# EAGLE board SNARFBASE-v03i2-new232 (EAGLE 5.11)
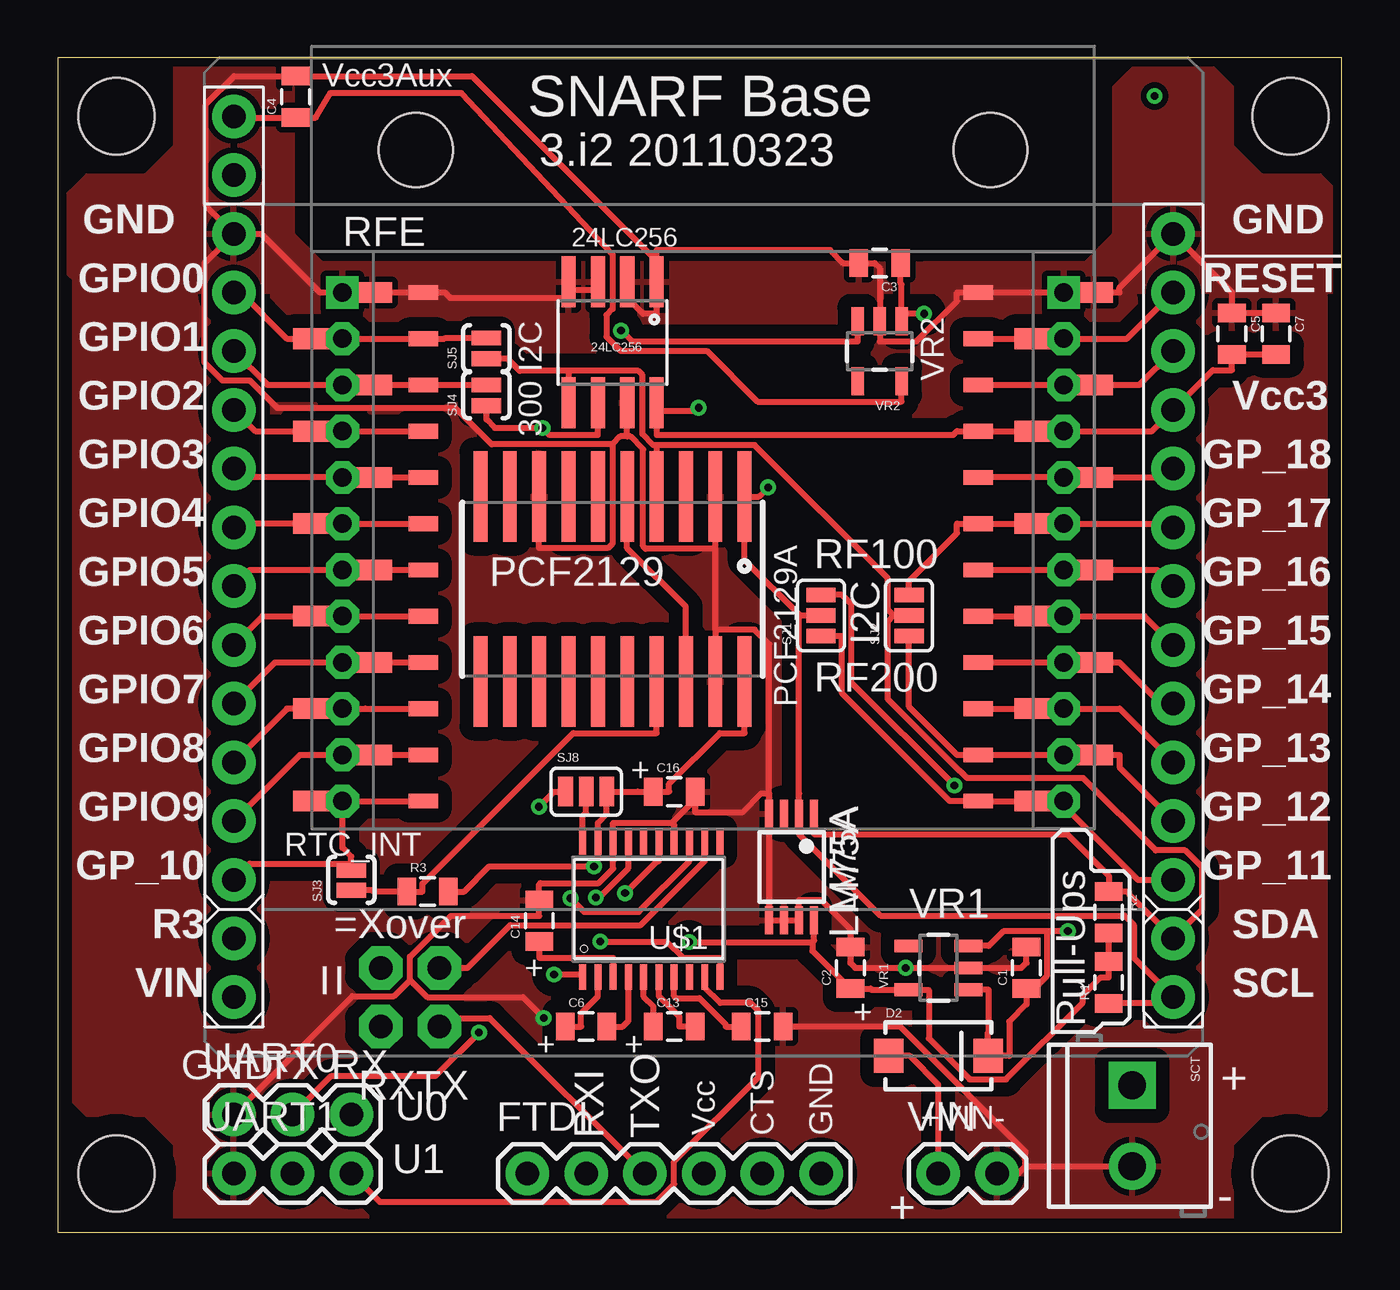
[diagram p0: board, top side]
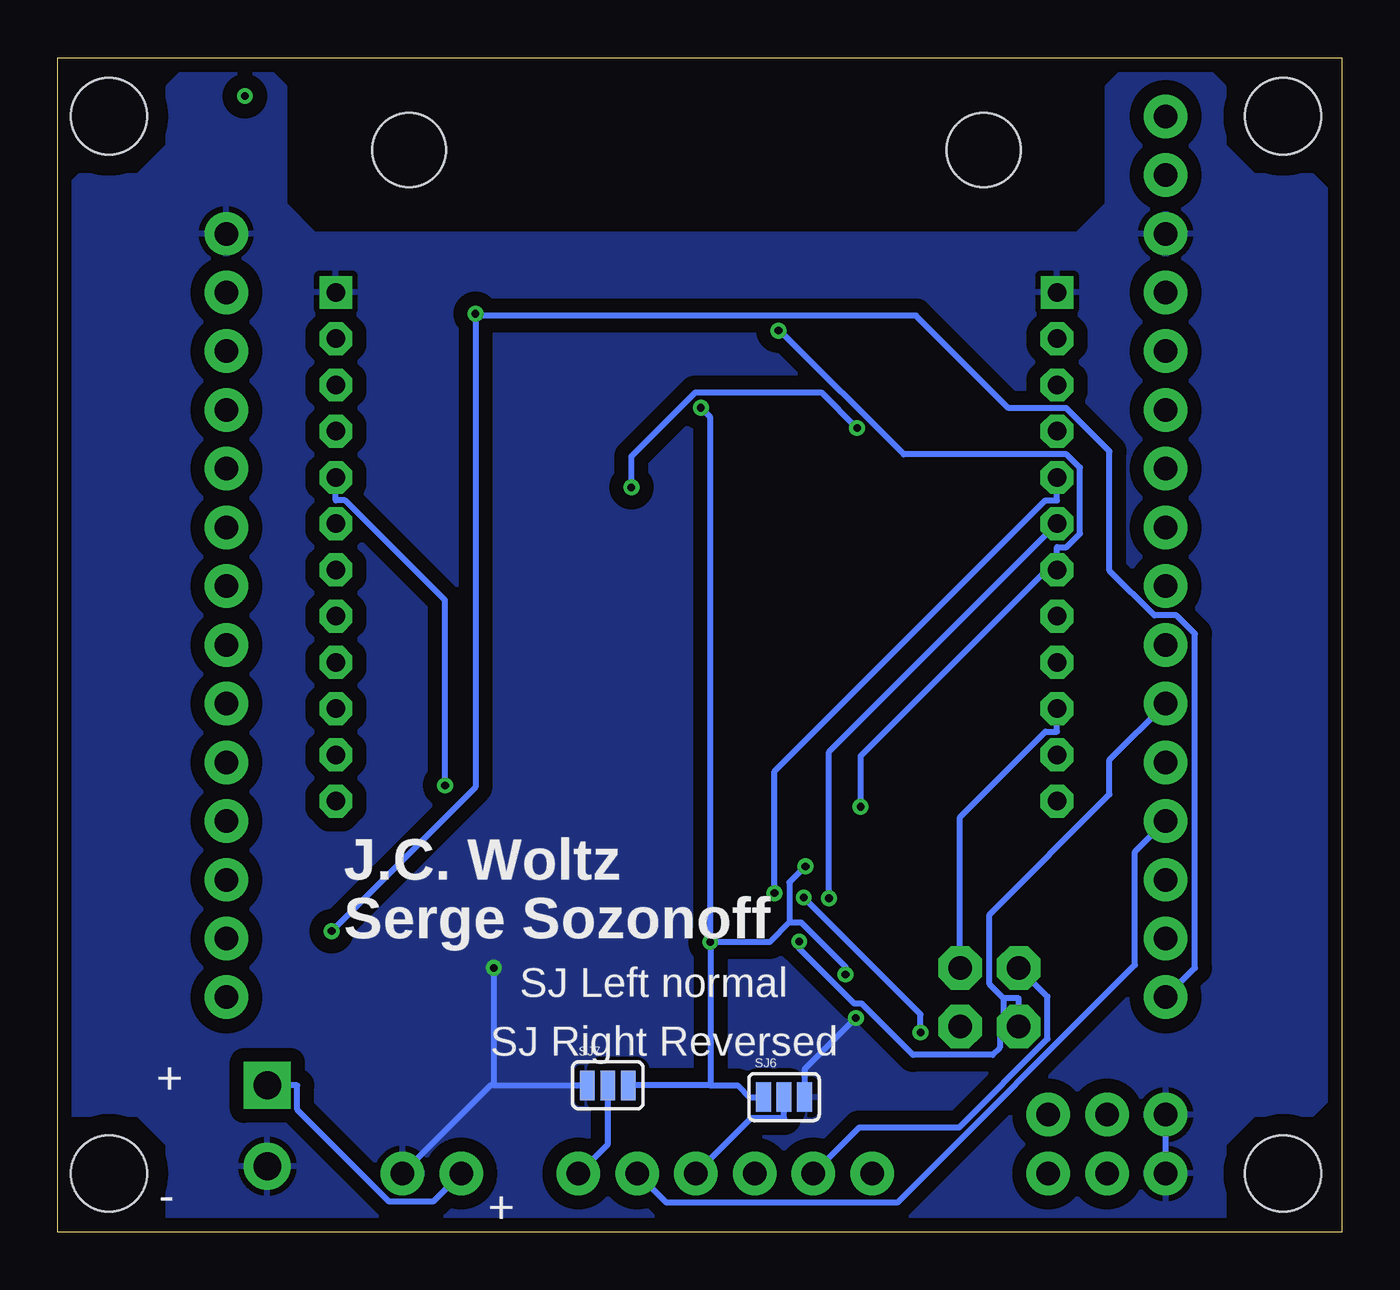
[diagram p1: board, bottom side, seen from below]

Size 55.55 x 50.79 mm. Coordinates in mm from the lower left corner, seen from the top.
Outline: 0,0 55.55,0 55.55,50.79 0,50.79 0,0
Copper layers (1*16): Top 0.0356mm / dielectric 1.5011mm / Bottom 0.0356mm
Design rules "LaenPCBOrder-JCModified": minimum track width 6mil, minimum drill 13mil, track to track 6mil, track to pad 6mil, pad to pad 6mil, via to via 6mil, smd to smd 6mil, copper to edge 15mil, drill to drill 6mil, minimum pad ring 12mil, minimum via ring 7mil, stop-mask expansion 4mil, vias tented up to drill 25mil, thermal gap 10mil
Net classes: 0 default: width 0.254 mm; 1 Power: width 0.508 mm; 2 smallsignal: width 0.152 mm; 3 stdsignal: width 0.254 mm

## Footprints (pad centres in the part's own frame; a part is rotated, then mirrored left to right if it is on the bottom)
SO08 = smd 0.61 x 2.21: 1 -1.905,-2.616; 2 -0.635,-2.616; 3 0.635,-2.616; 4 1.905,-2.616; 5 1.905,2.616; 6 0.635,2.616; 7 -0.635,2.616; 8 -1.905,2.616
SYNSJ-STACK = drill 1.016 pad 1.88 round: G0 0,-7.62; G1 0,-10.16; G2 0,-12.7; G3 0,-15.24; G4 0,-17.78; G5 0,-20.32; G6 0,-22.86; G7 0,-25.4; G8 0,-27.94; G9 0,-30.48; G10 0,-33.02; G11 40.64,-33.02; G12 40.64,-30.48; G13 40.64,-27.94; G14 40.64,-25.4; G15 40.64,-22.86; G16 40.64,-20.32; G17 40.64,-17.78; G18 40.64,-15.24; GND 0,-5.08; GND1 40.64,-5.08; R1 0,0; R2 0,-2.54; R3 0,-35.56; R4 0,-38.1; R5 40.64,-38.1; R6 40.64,-35.56; RESERVED 40.64,-10.16; RESET 40.64,-7.62; VCC 40.64,-12.7
0805 = smd 0.8 x 1.2: 1 -0.9,0; 2 0.9,0
SMA-DIODE = smd 1.27 x 1.47: A -2.15,0; C 2.15,0
1X06 = drill 1.016 pad 1.88 round: 1 0,0; 2 2.54,0; 3 5.08,0; 4 7.62,0; 5 10.16,0; 6 12.7,0
STAND-OFF = hole 3.302: 0,0
TSSOP8-3MM = smd 1.2 x 0.35: 1 -2.6,0.975; 2 -2.6,0.325; 3 -2.6,-0.325; 4 -2.6,-0.975; 5 2,-0.975; 6 2,-0.325; 7 2,0.325; 8 2,0.975
SO20W = smd 0.6 x 3.9: P$1 -5.715,-4; P$2 -4.445,-4; P$3 -3.175,-4; P$4 -1.905,-4; P$5 -0.635,-4; P$6 0.635,-4; P$7 1.905,-4; P$8 3.175,-4; P$9 4.445,-4; P$10 5.715,-4; P$11 5.715,4; P$12 4.445,4; P$13 3.175,4; P$14 1.905,4; P$15 0.635,4; P$16 -0.635,4; P$17 -1.905,4; P$18 -3.175,4; P$19 -4.445,4; P$20 -5.715,4
SYNAPSERFENGINE-THM-SMT-JACK2 = drill 0.8 square: 1 0,0; 24 31.2,0 | drill 0.8 pad 1.422 octagon: 2 0,-2; 3 0,-4; 4 0,-6; 5 0,-8; 6 0,-10; 7 0,-12; 8 0,-14; 9 0,-16; 10 0,-18; 11 0,-20; 12 0,-22; 13 31.2,-22; 14 31.2,-20; 15 31.2,-18; 16 31.2,-16; 17 31.2,-14; 18 31.2,-12; 19 31.2,-10; 20 31.2,-8; 21 31.2,-6; 22 31.2,-4; 23 31.2,-2 | smd 1.67 x 0.89: P1 1.3,0; P2 -1.3,-2; P3 1.3,-4; P4 -1.3,-6; P5 1.3,-8; P6 -1.3,-10; P7 1.3,-12; P8 -1.3,-14; P9 1.3,-16; P10 -1.3,-18; P11 1.3,-20; P12 -1.3,-22; P13 29.9,-22; P14 32.5,-20; P15 29.9,-18; P16 32.5,-16; P17 29.9,-14; P18 32.5,-12; P19 29.9,-10; P20 32.5,-8; P21 29.9,-6; P22 32.5,-4; P23 29.9,-2; P24 32.5,0 | smd 1.27 x 0.635: P201 3.5,0; P202 3.5,-2; P203 3.5,-4; P204 3.5,-6; P205 3.5,-8; P206 3.5,-10; P207 3.5,-12; P208 3.5,-14; P209 3.5,-16; P210 3.5,-18; P211 3.5,-20; P212 3.5,-22; P213 27.5,-22; P214 27.5,-20; P215 27.5,-18; P216 27.5,-16; P217 27.5,-14; P218 27.5,-12; P219 27.5,-10; P220 27.5,-8; P221 27.5,-6; P222 27.5,-4; P223 27.5,-2; P224 27.5,0 | hole 3.2: 3.17,6.16; 28.03,6.16
2X02_PTH = drill 1.016 pad 1.88 octagon: 1 -1.27,-1.27; 2 -1.27,1.27; 3 1.27,-1.27; 4 1.27,1.27
SCREWTERMINAL-3.5MM-2 = drill 1.2 pad 2.032 square: 1 0,0 | drill 1.2 pad 2.032 round: 2 3.5,0
SJ_3 = smd 0.635 x 1.27: 1 -0.889,0; 2 0,0; 3 0.889,0
SJ_2S-NOTRACE = smd 0.635 x 1.27: 1 -0.45,0; 2 0.4,0
SJ_2S-NO = smd 0.635 x 1.27: 1 -0.45,0; 2 0.45,0
SJ_3_PASTE1&2 = smd 0.635 x 1.27: 1 -0.889,0; 2 0,0; 3 0.889,0
TSSOP20-JC = smd 1.1 x 0.3: 1 -2.937,2.693; 2 -2.937,2.032; 3 -2.937,1.372; 4 -2.937,0.712; 5 -2.937,0.051; 6 -2.937,-0.609; 7 -2.937,-1.27; 8 -2.943,-1.93; 9 -2.937,-2.59; 10 -2.937,-3.251; 11 2.905,-3.251; 12 2.905,-2.59; 13 2.911,-1.93; 14 2.905,-1.27; 15 2.905,-0.609; 16 2.905,0.051; 17 2.905,0.712; 18 2.905,1.372; 19 2.905,2.032; 20 2.905,2.693
1X03 = drill 1.016 pad 1.88 round: 1 0,0; 2 2.54,0; 3 5.08,0
1X02 = drill 1.016 pad 1.88 round: 1 0,0; 2 2.54,0
SOT23-5 = smd 0.55 x 1.2: 1 -0.95,-1.3; 2 0,-1.3; 3 0.95,-1.3; 4 0.95,1.3; 5 -0.95,1.3

## Placement (x,y rotation side)
24LC256  24LC256T-I/SN  [SO08]  24,38.48 180 top
ADDON  SYNAPSE-SJ-STCKINGD30-1600  [SYNSJ-STACK]  7.62,48.26 0 top
C1  1uF  [0805]  41.91,11.43 90 top
C2  1uF  [0805]  34.29,11.43 90 top
C3  1uF  [0805]  35.56,41.91 180 top
C4  1uF  [0805]  10.29,49.1 90 top
C5  1uF  [0805]  50.8,38.86 270 top
C6  0.1uF  [0805]  22.86,8.89 0 top
C7  10uF  [0805]  52.7,38.86 270 top
C13  0.1uF  [0805]  26.67,8.89 0 top
C14  0.1uF  [0805]  20.83,13.46 90 top
C15  0.1uF  [0805]  30.48,8.89 0 top
C16  0.1uF  [0805]  26.67,19.05 0 top
D2  [SMA-DIODE]  38.1,7.62 0 top
FTDI  [1X06]  20.32,2.54 0 top
JP6  STAND-OFF  [STAND-OFF]  53.34,2.54 0 top
JP9  STAND-OFF  [STAND-OFF]  2.54,2.54 0 top
JP10  STAND-OFF  [STAND-OFF]  53.34,48.26 0 top
JP11  STAND-OFF  [STAND-OFF]  2.54,48.26 0 top
LM75A  LM75AJC-TEST  [TSSOP8-3MM]  31.75,15.49 270 top
PCF2129A  PCF2129ASO20  [SO20W]  24,27.81 180 top
R1  [0805]  45.47,10.79 90 top
R2  [0805]  45.47,13.84 270 top
R3  [0805]  16,14.73 0 top
RFE  RFE  [SYNAPSERFENGINE-THM-SMT-JACK2]  12.32,40.64 0 top
RXTX  SERIAL_CROSSOVER  [2X02_PTH]  15.24,10.16 180 top
SCT  [SCREWTERMINAL-3.5MM-2]  46.48,6.35 270 top
SJ1  [SJ_3]  33.02,26.67 90 top
SJ2  [SJ_3]  36.83,26.67 90 top
SJ3  SOLDERJUMPERNC2  [SJ_2S-NOTRACE]  12.7,15.24 90 top
SJ4  SOLDERJUMPERNO  [SJ_2S-NO]  18.54,36.2 90 top
SJ5  SOLDERJUMPERNO  [SJ_2S-NO]  18.54,38.23 90 top
SJ6  [SJ_3_PASTE1&2]  24.13,5.84 0 bottom
SJ7  [SJ_3_PASTE1&2]  31.75,6.35 0 bottom
SJ8  [SJ_3_PASTE1&2]  22.86,19.05 0 top
U$1  ICL3223JC  [TSSOP20-JC]  25.4,13.97 90 top
UART0  [1X03]  7.62,5.08 0 top
UART1  [1X03]  7.62,2.54 0 top
VIN  [1X02]  38.1,2.54 0 top
VR1  MCP1802  [SOT23-5]  38.1,11.43 90 top
VR2  MCP1802  [SOT23-5]  35.56,38.1 180 top

## Library data of the parts
24LC256 D2 FTDI JP6 JP9-JP11 R1-R3 SCT SJ1-SJ8 UART0 UART1 VIN = SparkFun
ADDON C1-C7 C13-C16 LM75A PCF2129A RFE RXTX U$1 VR1 VR2 = 0_jc-custom

## Nets
!FORCEOFF: SJ8.2 U$1.20
FTDI_GND: FTDI.6 SJ7.2
FTDI_VCC: FTDI.4 SJ6.2
GND: 24LC256.1 24LC256.2 24LC256.3 24LC256.4 24LC256.7 ADDON.GND ADDON.GND1 C1.2 C2.2 C3.2 C4.2 C5.1 C7.1 C14.2 C15.2 C16.2 LM75A.4 LM75A.5 LM75A.6 LM75A.7 PCF2129A.P$2 PCF2129A.P$8 PCF2129A.P$19 RFE.1 RFE.24 RFE.P1 RFE.P24 RFE.P201 RFE.P224 SCT.2 SJ6.3 SJ7.1 U$1.14 U$1.18 UART0.1 UART1.1 VIN.2 VR1.2 VR2.2
GPIO0: ADDON.G0 RFE.2 RFE.P2 RFE.P202 SJ5.2
GPIO1: ADDON.G1 RFE.3 RFE.P3 RFE.P203 SJ4.2
GPIO2: ADDON.G2 RFE.4 RFE.P4 RFE.P204
GPIO3: ADDON.G3 RFE.5 RFE.P5 RFE.P205 U$1.15
GPIO4: ADDON.G4 RFE.6 RFE.P6 RFE.P206 U$1.13
GPIO5: ADDON.G5 RFE.7 RFE.P7 RFE.P207 SJ8.1 VR2.3
GPIO6: ADDON.G6 RFE.8 RFE.P8 RFE.P208
GPIO7: ADDON.G7 RFE.9 RFE.P9 RFE.P209 RXTX.4 U$1.10
GPIO8: ADDON.G8 RFE.10 RFE.P10 RFE.P210 RXTX.1 U$1.12
GPIO9: ADDON.G9 FTDI.5 RFE.11 RFE.P11 RFE.P211
GPIO10: ADDON.G10 RFE.12 RFE.P12 RFE.P212 SJ3.2
GPIO11: ADDON.G11 RFE.13 RFE.P13 RFE.P213 SJ1.1
GPIO12: ADDON.G12 RFE.14 RFE.P14 RFE.P214 SJ2.1
GPIO13: ADDON.G13 RFE.15 RFE.P15 RFE.P215
GPIO14: ADDON.G14 RFE.16 RFE.P16 RFE.P216
GPIO15: ADDON.G15 RFE.17 RFE.P17 RFE.P217
GPIO16: ADDON.G16 RFE.18 RFE.P18 RFE.P218
GPIO17: ADDON.G17 RFE.19 RFE.P19 RFE.P219 SJ2.3
GPIO18: ADDON.G18 RFE.20 RFE.P20 RFE.P220 SJ1.3
GPIO19: ADDON.RESERVED RFE.22 RFE.P22 RFE.P222
IFS: PCF2129A.P$5 PCF2129A.P$18
N$1: C13.1 U$1.5
N$2: C13.2 U$1.6
N$3: C6.1 U$1.2
N$5: C6.2 U$1.4
N$7: FTDI.1
N$9: C14.1 U$1.3
N$10: C15.1 U$1.7
N$11: LM75A.3
N$12: ADDON.R2
N$16: ADDON.R3
N$20: U$1.11
R6: PCF2129A.P$17 R3.1 SJ3.1
RESET_L: ADDON.RESET RFE.23 RFE.P23 RFE.P223
RX0: UART0.3
RX1: U$1.9 UART1.3
RXI: FTDI.2 RXTX.3
SCL: 24LC256.6 ADDON.R5 LM75A.2 PCF2129A.P$1 R1.1 SJ1.2 SJ4.1
SDA: 24LC256.5 ADDON.R6 LM75A.1 PCF2129A.P$4 R2.1 SJ2.2 SJ5.1
TX0: U$1.17 UART0.2
TX1: UART1.2
TXO: FTDI.3 RXTX.2
VCC3: 24LC256.8 ADDON.VCC C2.1 C5.2 C7.2 C16.1 LM75A.8 PCF2129A.P$20 R1.2 R2.2 R3.2 RFE.21 RFE.P21 RFE.P221 SJ6.1 SJ7.3 SJ8.3 U$1.1 U$1.19 VR1.5
VCC3A: ADDON.R1 C4.1 VR2.5
VIN: ADDON.R4 C1.1 C3.1 D2.C VR1.1 VR1.3 VR2.1
VIN_PREDIODE: D2.A SCT.1 VIN.1

## Tracks (layer width: path | path; a pad name or v marks a point on that pad's centre or on a via)
!FORCEOFF
  Top 0.254: SJ8.2 22.86,18.14 22.71,17.98 U$1.20
BOB  (via drill 0.33 pad 0.69)
  other vias: 47.45,49.14
FTDI_GND
  Bottom 0.254: SJ7.2 31.75,3.81 FTDI.6
FTDI_VCC
  Bottom 0.254: SJ6.2 24.13,4.93 25.55,4.93 FTDI.4
GND  (via drill 0.33 pad 0.69)
  Top 0.254: 23.99,34.07 18.78,34.07 17.21,35.64 9.51,35.64 8.31,36.83 7.12,36.83 6.35,37.6 6.35,41.91 ADDON.GND | 24.64,34.41 24.33,34.41 23.99,34.07 | 23.99,34.07 23.99,29.77 23.8,29.58 20.83,29.58 PCF2129A.P$8 | 15.24,10.9 15.24,11.91 17.01,13.68 20.83,13.68 C14.2 20.83,15.04 20.88,15.1 23.4,15.1 24.03,15.72 24.03,16.05 U$1.18 24.03,17.29 24.03,17.7 26.57,17.7 | UART0.1 12.75,10.21 14.55,10.21 15.24,10.9 | 15.24,10.9 15.98,10.16 20.12,10.16 v21.02,9.26 | 25.91,42.01 17.92,50 C4.2 7.63,50 6.4,48.77 6.4,44.4 ADDON.GND | 25.91,42.01 25.91,42.48 33.41,42.48 33.98,41.91 C3.2 34.98,41.91 35.34,41.91 35.56,41.69 VR2.2 35.56,38.52 37.16,38.52 38.9,40.27 38.9,40.64 RFE.P224 RFE.24 RFE.P24 45.93,40.64 45.93,40.85 ADDON.GND1 50.8,40.64 C5.1 C7.1 | 25.91,42.01 24LC256.1 25.91,39.71 25.33,39.71 24.64,40.41 24LC256.2 | 28.45,26.06 PCF2129A.P$19 | 28.45,26.06 28.45,29.56 | 28.45,26.06 30.15,26.06 30.77,25.44 30.77,18.97 | 27.57,18.89 27.57,18.17 29.63,18.17 30.43,18.97 30.77,18.97 | 27.57,18.89 27.57,18.91 27.57,18.97 C16.2 | 26.57,17.7 27.57,18.7 27.57,18.89 | 26.57,17.7 26.67,17.61 U$1.14 | 28.45,29.56 PCF2129A.P$2 | 28.45,29.56 25.44,29.56 25.33,29.66 25.33,33.86 24.77,34.41 24.64,34.41 | 24.64,34.41 24.64,34.48 24LC256.7 | 22.1,40.75 22.1,40.41 16.97,40.41 16.73,40.64 RFE.P201 RFE.P1 RFE.1 11.34,40.64 8.79,43.18 ADDON.GND | 22.1,40.75 24LC256.4 | 22.1,40.75 23.37,40.75 24LC256.3 | C1.2 41.91,11.65 41.69,11.43 VR1.2 38.96,11.43 38.52,11.43 v36.69,11.43 34.51,11.43 34.29,11.65 34.29,11.99 C2.2 34.29,13.1 33.02,14.37 32.08,14.37 LM75A.7 LM75A.6 LM75A.5 LM75A.4 30.77,18.97
  Top 0.254: 41.87,2.85 41.87,3.47 36.46,8.89 32.06,8.89 C15.2 | VIN.2 41.56,2.54 41.87,2.85 | 41.87,2.85 SCT.2
  Bottom 0.254: v21.02,9.26 23.24,7.04 SJ6.3 | 36.69,6.35 36.83,6.35 VIN.2 | 36.69,6.35 SJ7.1 | v36.69,11.43 36.69,6.35 | UART1.1 UART0.1
  pour Top (isolate 0.61): 0,41.91 0,6.35 1.27,5.08 3.81,5.08 5.08,3.81 5.08,0 50.8,0 50.8,3.81 52.07,5.08 54.61,5.08 55.88,6.35 55.88,41.91
  pour Bottom (isolate 0.61): 0,44.45 0,6.35 1.27,5.08 3.81,5.08 5.08,3.81 5.08,0 50.8,0 50.8,3.81 52.07,5.08 55.88,5.08 55.88,44.45 54.61,45.72 52.07,45.72 50.8,46.99 50.8,49.53 49.53,50.8 46.99,50.8 45.72,49.53 45.72,44.45 44.45,43.18 11.43,43.18 10.16,44.45 10.16,49.53 8.89,50.8 6.35,50.8 5.08,49.53 5.08,46.99 3.81,45.72 1.27,45.72
  pour Top (isolate 0.254): 0,41.91 0,44.45 1.27,45.72 3.81,45.72 5.08,46.99 5.08,50.8 8.89,50.8 10.16,49.53 10.16,43.18 11.43,41.91 44.45,41.91 45.72,43.18 45.72,49.53 46.99,50.8 49.53,50.8 50.8,49.53 50.8,46.99 52.07,45.72 54.61,45.72 55.88,44.45 55.88,40.64 1.27,40.64
GPIO0
  Top 0.254: ADDON.G0 7.9,40.64 9.9,38.64 RFE.P2 RFE.2 RFE.P202 16.28,38.64 16.73,38.64 16.77,38.68 SJ5.2
GPIO1
  Top 0.254: ADDON.G1 9.08,36.64 RFE.3 RFE.P3 RFE.P203 16.28,36.64 16.73,36.64 16.74,36.65 SJ4.2
GPIO2
  Top 0.254: ADDON.G2 8.54,34.64 RFE.P4 RFE.4 RFE.P204
GPIO3  (via drill 0.33 pad 0.69)
  Top 0.254: U$1.15 26.01,16.05 25.92,16.05 v24.54,14.66 | ADDON.G3 8,32.64 RFE.5 RFE.P5 RFE.P205
  Bottom 0.254: RFE.5 12.32,31.65 12.81,31.65 24.54,19.92 v24.54,14.66
GPIO4  (via drill 0.33 pad 0.69)
  Top 0.254: U$1.13 27.33,16.05 25.13,13.85 22.78,13.85 v22.18,14.44 | RFE.P206 RFE.6 RFE.P6 7.78,30.64 ADDON.G4
  Bottom 0.254: v22.18,14.44 22.18,20.78 RFE.6
GPIO5  (via drill 0.33 pad 0.69)
  Top 0.254: SJ8.1 21.37,19.05 21.37,18.95 v20.82,18.4 | VR2.3 34.61,38.52 24.84,38.52 v24.37,38.99 | RFE.P207 14.73,28.64 14.18,28.64 RFE.P7 RFE.7 8.32,28.64 ADDON.G5
  Bottom 0.254: v24.37,38.99 24.3,38.99 18.95,33.64 11.9,33.64 11.33,33.06 11.33,30.21 11.91,29.63 12.32,29.63 12.32,29.08 | 12.32,29.08 20.82,20.59 v20.82,18.4 | RFE.7 12.32,29.08
GPIO6
  Top 0.254: ADDON.G6 8.86,26.64 RFE.P8 RFE.8 RFE.P208
GPIO7  (via drill 0.33 pad 0.69)
  Top 0.254: U$1.10 28.65,11.86 27.05,11.86 26.34,12.57 v23.47,12.57 | ADDON.G7 9.4,24.64 RFE.9 RFE.P9 RFE.P209
  Bottom 0.254: v23.47,12.57 23.47,12.26 21.09,9.89 20.76,9.89 18.54,7.66 15.11,7.66 14.79,7.98 14.79,8.88 14.63,9.05 14.63,10.11 | ADDON.G7 10.04,20.44 10.04,18.93 15.24,13.74 15.24,10.72 14.63,10.11 | 14.63,10.11 13.97,10.11 RXTX.4
GPIO8
  Top 0.254: ADDON.G8 9.9,22.61 9.9,22.64 RFE.P10 RFE.10 13.31,22.64 RFE.P210 | RXTX.1 17.73,11.43 19.57,13.28 25.22,13.28 27.99,16.05 U$1.12
  Bottom 0.254: RFE.10 12.32,21.65 12.81,21.65 16.51,17.95 RXTX.1
GPIO9
  Top 0.254: ADDON.G9 10.48,20.64 RFE.11 RFE.P11 RFE.P211
  Bottom 0.254: FTDI.5 29.22,1.28 19.23,1.28 8.94,11.56 8.94,16.46 ADDON.G9
GPIO10
  Top 0.254: 12.7,15.94 8.32,15.94 ADDON.G10 | 12.7,15.94 12.7,16.24 12.32,16.62 RFE.12 | 12.7,15.94 SJ3.2 | RFE.12 RFE.P12 | RFE.12 RFE.P212
GPIO11
  Top 0.254: SJ1.1 33.93,25.78 33.93,23.3 38.59,18.64 38.9,18.64 RFE.P213 RFE.P13 43.33,18.64 | 43.33,18.64 RFE.13 | 43.33,18.64 46.73,15.24 ADDON.G11
GPIO12
  Top 0.254: ADDON.G12 45.93,20.11 45.93,20.64 RFE.P14 RFE.14 RFE.P214 39.36,20.64 38.9,20.64 36.83,22.71 SJ2.1
GPIO13
  Top 0.254: ADDON.G13 45.94,22.64 RFE.15 RFE.P15 RFE.P215
GPIO14
  Top 0.254: ADDON.G14 47.71,22.86 45.93,24.64 RFE.P16 RFE.16 RFE.P216
GPIO15
  Top 0.254: ADDON.G15 47.02,26.64 RFE.17 RFE.P17 RFE.P217
GPIO16
  Top 0.254: ADDON.G16 47.56,28.64 RFE.P18 RFE.18 RFE.P218
GPIO17
  Top 0.254: ADDON.G17 48.1,30.64 RFE.19 RFE.P19 RFE.P219 39.36,30.64 38.9,30.64 38.9,30.23 36.83,28.16 SJ2.3
GPIO18  (via drill 0.33 pad 0.69)
  Top 0.254: SJ1.3 33.93,27.56 34.34,27.15 34.34,23.77 v38.79,19.32 | ADDON.G18 47.88,32.64 RFE.P20 RFE.20 RFE.P220
  Bottom 0.254: RFE.20 43.52,31.65 43.11,31.65 38.79,27.33 v38.79,19.32
GPIO19
  Top 0.254: ADDON.RESERVED 46.8,36.64 RFE.P22 RFE.22 RFE.P222
IFS
  Top 0.254: PCF2129A.P$5 24.64,29.58 27.18,27.04 PCF2129A.P$18
N$1
  Top 0.254: C13.1 25.77,9.77 25.35,10.19 U$1.5
N$2
  Top 0.254: C13.2 26.89,8.89 26.89,9.32 26.01,10.2 U$1.6
N$3
  Top 0.254: C6.1 22.64,8.89 22.64,9.47 23.37,10.2 U$1.2
N$5
  Top 0.254: C6.2 24.44,8.89 24.69,9.14 U$1.4
N$9
  Top 0.254: C14.1 20.83,11.88 20.85,11.86 24.03,11.86 U$1.3
N$10
  Top 0.254: U$1.7 26.67,10.2 26.75,10.12 27.76,10.12 28.9,8.97 28.9,8.89 C15.1
R6
  Top 0.254: PCF2129A.P$17 25.91,21.58 22.29,21.58 15.78,15.07 15.78,14.73 R3.1 13.67,14.73 13.61,14.79 SJ3.1
RESET_L
  Top 0.254: ADDON.RESET 46.26,38.64 RFE.23 RFE.P23 RFE.P223
RX1
  Top 0.254: UART1.3 13.93,1.31 25.9,1.31 26.67,2.08 26.67,3.06 30.32,6.71 30.32,9.57 29.97,9.91 28.67,9.91 27.99,10.59 U$1.9
RXI
  Bottom 0.254: RXTX.3 12.73,10.19 12.73,8.36 16.56,4.52 20.88,4.52 FTDI.2
SCL  (via drill 0.33 pad 0.69)
  Top 0.254: v30.73,32.21 30.34,31.81 PCF2129A.P$1 29.72,29.06 32.1,26.67 | 32.1,26.67 32.08,26.64 32.08,18.97 32.08,18.43 LM75A.2 32.08,17.21 35.6,13.69 46.16,13.69 46.55,13.3 46.55,11.87 ADDON.R5 47.99,9.89 R1.1 | 24LC256.6 23.37,35.17 23.37,34.48 21.26,34.48 v20.97,34.78 18.91,34.78 18.54,35.15 SJ4.1 | 32.1,26.67 SJ1.2
  Bottom 0.254: v20.97,34.78 22.51,36.32 27.97,36.32 30.73,33.56 v30.73,32.21
SDA
  Top 0.254: 36.16,26.67 35.92,26.42 35.92,23.05 39.03,19.94 39.05,19.94 39.35,19.64 44.37,19.64 47.5,16.51 48.78,16.51 49.52,15.78 49.52,13.96 ADDON.R6 46.35,14.61 46.35,14.74 R2.1 45.47,15.42 43.67,17.21 32.73,17.21 32.73,17.65 LM75A.1 | 25.91,34.04 30.15,34.04 35.92,28.28 35.92,26.92 36.16,26.67 | 25.91,34.04 25.91,33.94 PCF2129A.P$4 | 36.16,26.67 SJ2.2 | 22.1,37.25 25.12,37.25 25.29,37.08 25.29,34.52 25.76,34.04 25.91,34.04 | 22.1,37.25 19.98,37.25 19.46,37.78 SJ5.1 | 22.1,37.25 24LC256.5
TX0  (via drill 0.33 pad 0.69)
  Top 0.254: v23.27,14.47 23.41,14.47 24.69,15.75 U$1.17 | UART0.2 11.83,6.75 16.35,6.75 v18.22,8.63
  Bottom 0.254: v23.27,14.47 18.22,9.42 v18.22,8.63
TXO
  Top 0.254: FTDI.3 18.69,9.25 16.87,9.25 RXTX.2
VCC3  (via drill 0.33 pad 0.69)
  Top 0.254: 25.91,35.51 25.91,34.48 38.74,34.48 38.9,34.64 RFE.P221 RFE.P21 RFE.21 47.34,34.64 ADDON.VCC 49.98,37.28 50.8,37.28 C5.2 C7.2 | 25.91,35.51 24LC256.8 | v27.73,35.65 27.59,35.51 25.91,35.51 | PCF2129A.P$20 29.72,21.58 28.64,21.58 26.45,19.39 26.45,19.05 C16.1 25.09,19.05 SJ8.3 23.75,18.09 23.37,17.7 U$1.19 23.37,16.05 23.2,15.88 v23.2,15.82 18.67,15.82 17.58,14.73 R3.2 | v21.47,11.14 22.59,11.14 U$1.1 | 32.65,12.54 v27.32,12.54 v27.32,12.55 | 32.65,12.54 32.73,12.61 LM75A.8 | 32.65,12.54 32.65,12.17 C2.1 35.17,10.53 35.22,10.48 VR1.5 37.68,10.48 37.68,8.38 39.46,6.61 41.02,6.61 44.35,9.93 44.35,10.25 45.11,11.02 45.47,11.02 R1.2 R2.2
  Bottom 0.254: v27.32,12.55 27.32,35.24 v27.73,35.65 | v27.32,12.55 24.75,12.55 23.9,13.4 | 23.9,13.4 23.39,13.4 21.47,11.47 v21.47,11.14 | 23.9,13.4 23.9,15.12 v23.2,15.82 | v27.32,12.55 27.32,6.35 | 27.32,6.35 26.12,6.35 25.62,5.84 SJ6.1 | 27.32,6.35 SJ7.3
VCC3A
  Top 0.254: VR2.5 36.51,35.92 30.27,35.92 28.08,38.11 24.35,38.11 23.74,38.73 23.74,39.66 24,39.93 24,42.29 17.46,49.28 11.8,49.28 11.17,48.2 C4.1 7.68,48.2 ADDON.R1
VIN  (via drill 0.33 pad 0.69)
  Top 0.254: 36.51,39.72 36.51,40.98 36.46,41.03 C3.1 | 36.51,39.72 VR2.1 | v37.48,39.72 36.51,39.72 | 42.79,13.01 40.91,13.01 40.28,12.38 VR1.3 | v43.7,13.02 v43.69,13.01 42.79,13.01 | 41.91,10.19 42.79,11.07 42.79,13.01 | 41.91,10.19 41.91,9.85 41.16,9.11 41.16,7.62 D2.C 40.25,8.63 40.28,8.66 40.28,10.48 VR1.1 | 41.91,10.19 C1.1
  Bottom 0.254: 37.48,39.64 v37.48,39.72 | v43.7,13.02 37.48,19.24 37.48,39.64 | 37.48,39.64 18.42,39.64 14.42,35.64 11.91,35.64 10.04,33.77 10.04,28.61 8.1,26.67 7.14,26.67 6.35,25.88 6.35,11.43 ADDON.R4
VIN_PREDIODE
  Top 0.254: D2.A 36.86,7.62 38.1,6.38 VIN.1
  Bottom 0.254: SCT.1 45.19,6.35 45.19,5.3 41.21,1.32 39.32,1.32 VIN.1

## Text on the board
tPlace: Vcc3Aux | SNARF Base | 3.i2 20110323 | GND | 24LC256 | GND | GPIO0 | !RESET | GPIO1 | GPIO2 | VR2 | Vcc3 | GPIO3 | 300 I2C | GP_18 | GPIO4 | RF100 | GP_17 | GPIO5 | PCF2129 | GP_16 | GPIO6 | I2C | RF200 | GP_15 | GPIO7 | GP_14 | GPIO8 | GP_13 | GPIO9 | + | LM75A | GP_12 | GP_10 | RTC_INT | GP_11 | R3 | VR1 | =Xover | SDA | VIN | + | = | SCL | + | Pull-Ups | + | + | GND | TX | RX | + | U0 | RXI | TXO | Vcc | CTS | GND | +VIN- | U1 | - | +
bPlace: J.C. Woltz | Serge Sozonoff | SJ Left normal | SJ Right Reversed | + | - | +